# EAGLE board LPC_4TE_TOP_3_53 (EAGLE 5.04)
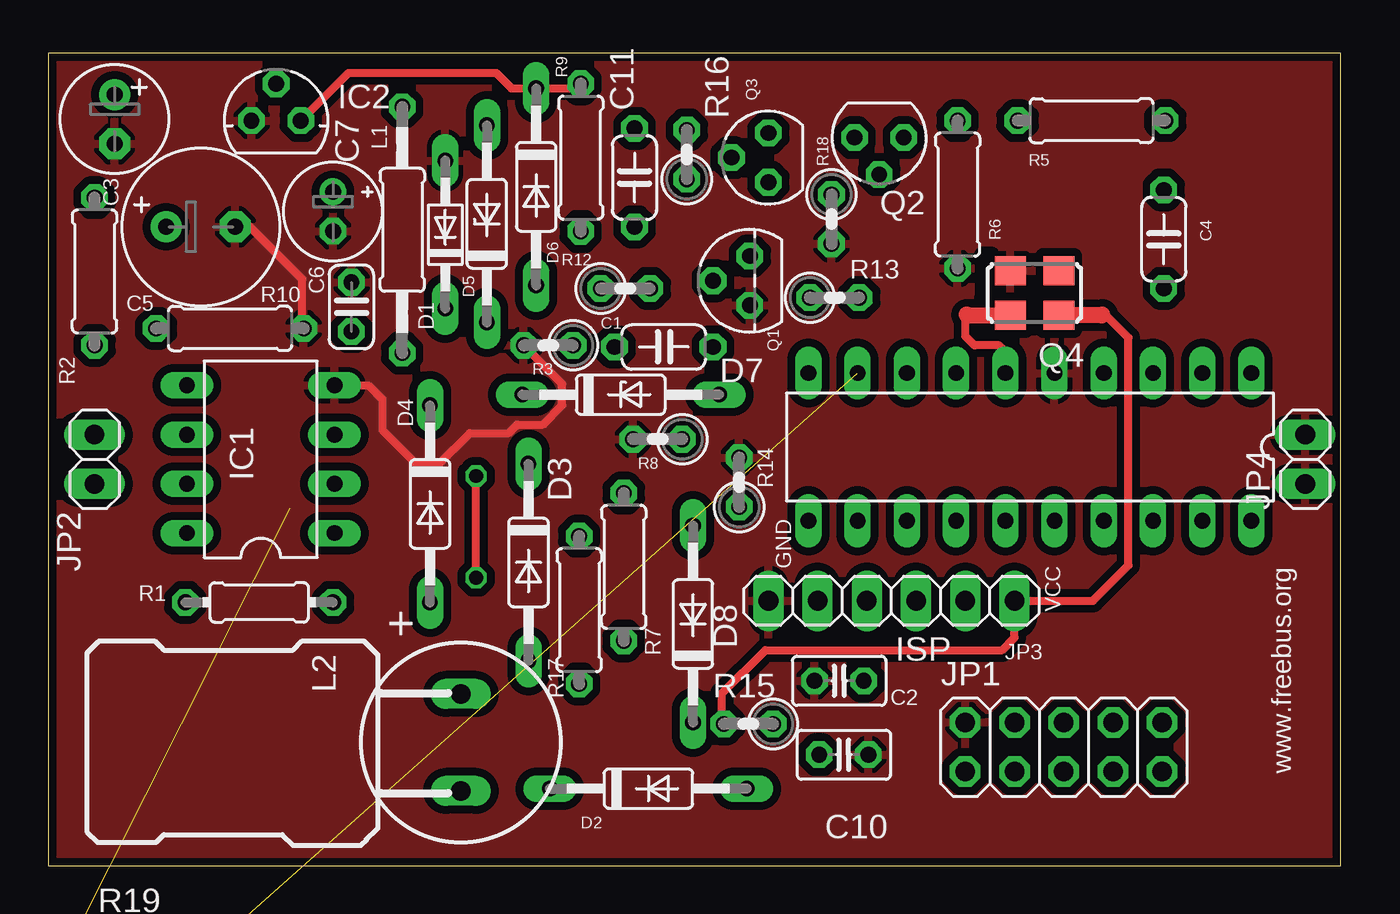
[diagram p0: board, top side]
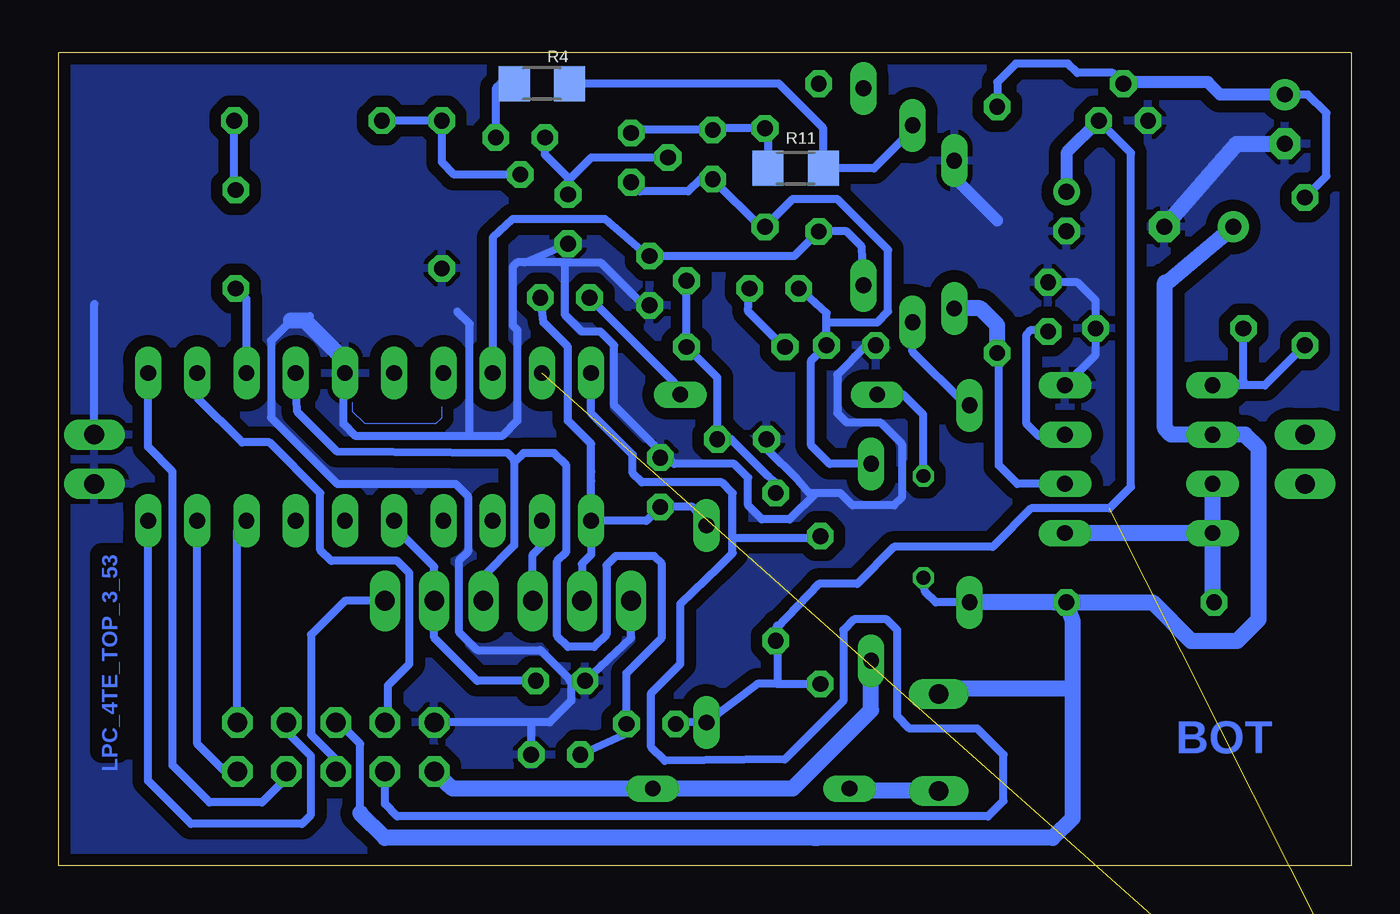
[diagram p1: board, bottom side, seen from below]

Size 66.68 x 41.91 mm. Coordinates in mm from the lower left corner, seen from the top.
Outline: 0,41.91 0,0 66.68,0 66.68,41.91 0,41.91
Copper layers (1*16): Top 0.035mm / dielectric 1.5mm / Bottom 0.035mm
Design rules "default_freebus": minimum track width 10mil, minimum drill 24mil, track to track 8mil, track to pad 8mil, pad to pad 8mil, via to via 8mil, smd to smd 8mil, copper to edge 12mil, drill to drill 8mil, minimum pad ring 11mil, minimum via ring 8mil, stop-mask expansion 4mil, vias tented up to drill 0mil, thermal gap 10mil
tRestrict: area 48.2,29.3 to 48.7,31.5

## Footprints (pad centres in the part's own frame; a part is rotated, then mirrored left to right if it is on the bottom)
DIL20@1 = drill 0.813 long: 1 -11.43,-3.81; 2 -8.89,-3.81; 3 -6.35,-3.81; 4 -3.81,-3.81; 5 -1.27,-3.81; 6 1.27,-3.81; 7 3.81,-3.81; 8 6.35,-3.81; 9 8.89,-3.81; 10 11.43,-3.81; 11 11.43,3.81; 12 8.89,3.81; 13 6.35,3.81; 14 3.81,3.81; 15 1.27,3.81; 16 -1.27,3.81; 17 -3.81,3.81; 18 -6.35,3.81; 19 -8.89,3.81; 20 -11.43,3.81
C050-024X044 = drill 0.813 octagon: 1 -2.54,0; 2 2.54,0
C025-025X050 = drill 0.813 octagon: 1 -1.27,0; 2 1.27,0
E2,5-6 = drill 0.813 pad 1.6 round: + -1.27,0 | drill 0.813 pad 1.6 octagon: - 1.27,0
E3,5-8 = drill 0.813 pad 1.6 round: + -1.778,0 | drill 0.813 pad 1.6 octagon: - 1.778,0
C025-024X044 = drill 0.813 octagon: 1 -1.27,0; 2 1.27,0
E2-5 = drill 0.813 pad 1.27 round: + -1.016,0 | drill 0.813 pad 1.27 octagon: - 1.016,0
DO34-7 = drill 0.813 long: A 3.81,0; C -3.81,0
DO35-10 = drill 0.813 long: A 5.08,0; C -5.08,0
DO35Z10 = drill 0.813 long: A 5.08,0; C -5.08,0
DIL08 = drill 0.813 long: 1 -3.81,-3.81; 2 -1.27,-3.81; 3 1.27,-3.81; 4 3.81,-3.81; 5 3.81,3.81; 6 1.27,3.81; 7 -1.27,3.81; 8 -3.81,3.81
79LXX = drill 0.813 octagon: GND -1.27,0; IN 0,1.905; OUT 1.27,0
2X05 = drill 1.016 octagon: 1 -5.08,-1.27; 2 -5.08,1.27; 3 -2.54,-1.27; 4 -2.54,1.27; 5 0,-1.27; 6 0,1.27; 7 2.54,-1.27; 8 2.54,1.27; 9 5.08,-1.27; 10 5.08,1.27
1X02 = drill 1.016 long: 1 -1.27,0; 2 1.27,0
1X06 = drill 1.016 long: 1 -6.35,0; 2 -3.81,0; 3 -1.27,0; 4 1.27,0; 5 3.81,0; 6 6.35,0
0207/12 = drill 0.813 octagon: 1 -6.35,0; 2 6.35,0
BS11 = drill 1 long: 1 -2.5,0; 2 2.5,0
TO92 = drill 0.813 octagon: 1 1.27,0; 2 0,1.905; 3 -1.27,0
SOT54A = drill 0.813 octagon: B 0,1.905; C -1.27,0; E 1.27,0
SOT54D = drill 0.813 octagon: B 1.27,0; C 0,1.905; E -1.27,0
ASF = smd 1.6 x 1.5: 1 -1.25,-1.15; 2 1.25,-1.15; 3 1.25,1.15; 4 -1.25,1.15
0204/7 = drill 0.813 octagon: 1 -3.81,0; 2 3.81,0
0207/7 = drill 0.813 octagon: 1 -3.81,0; 2 3.81,0
0207/2V = drill 0.813 octagon: 1 -1.27,0; 2 1.27,0
R1206 = smd 1.6 x 1.803: 1 -1.422,0; 2 1.422,0

## Placement (x,y rotation side)
89LPC922  89LPC922  [DIL20@1]  50.64,21.59 180 top
C1  100n  [C050-024X044]  31.75,26.75 0 top
C2  100n  [C025-025X050]  40.8,9.53 0 top
C3  100µ  [E2,5-6]  3.41,38.5 270 top
C4  10n  [C050-024X044]  57.55,32.31 270 top
C5  100µ  [E3,5-8]  7.86,32.94 0 top
C6  470p  [C025-024X044]  15.64,28.81 90 top
C7  1µ  [E2-5]  14.68,33.73 270 top
C10  100n  [C025-025X050]  41.04,5.72 0 top
C11  10n  [C050-024X044]  30.24,35.48 90 top
D1  BAT46  [DO34-7]  20.48,32.54 90 top
D2  1N4148  [DO35-10]  30.96,3.97 0 top
D3  1N4148  [DO35-10]  24.76,15.64 270 top
D4  1N4148  [DO35-10]  19.68,18.65 270 top
D5  ZD7V5  [DO35Z10]  22.62,33.1 90 top
D6  BAT46  [DO35-10]  25.16,35.01 270 top
D7  ZPD18  [DO35Z10]  29.53,24.29 0 top
D8  1N4148  [DO35-10]  33.26,12.46 90 top
IC1  MC34063AP  [DIL08]  10.95,20.96 90 top
IC2  [79LXX]  11.75,38.42 0 top
JP1  [2X05]  52.39,6.11 0 top
JP2  [1X02]  2.38,20.96 90 top
JP3  [1X06]  43.5,13.65 180 top
JP4  [1X02]  64.85,20.96 90 top
L1  220µ  [0207/12]  18.26,32.78 90 top
L2  150mH  [BS11]  21.27,6.35 90 top
Q1  BC557  [TO92]  36.19,30.16 90 top
Q2  BC547  [SOT54A]  42.86,37.55 180 top
Q3  BC640  [SOT54D]  37.15,36.51 90 top
Q4  [ASF]  50.88,29.53 180 top
R1  3R3  [0204/7]  10.87,13.57 0 top
R2  3k6  [0207/7]  2.38,30.64 90 top
R3  100k  [0207/2V]  25.8,26.83 180 top
R4  2k2  [R1206]  41.75,40.32 0 bottom
R5  5k6  [0207/7]  53.82,38.42 180 top
R6  100k  [0207/7]  46.91,34.61 90 top
R7  82k  [0207/7]  29.69,15.4 90 top
R8  47k  [0207/2V]  31.43,21.99 180 top
R9  10k  [0207/7]  27.46,36.51 270 top
R10  1k2  [0207/7]  9.37,27.7 180 top
R11  1k  [R1206]  28.65,35.96 0 bottom
R12  10k  [0207/2V]  29.76,29.77 0 top
R13  330k  [0207/2V]  40.56,29.29 0 top
R14  1M  [0207/2V]  35.64,19.76 90 top
R15  5k6  [0207/2V]  36.12,7.3 180 top
R16  1k  [0207/2V]  32.94,36.67 90 top
R17  3k3  [0207/7]  27.38,13.18 90 top
R18  5R6  [0207/2V]  40.4,33.34 270 top
R19  3k3  [0207/7]  5.08,-3.81 0 top  (outside the outline)

## Library data of the parts
89LPC922 = micro-philips
C1-C7 C10 C11 L1 R1-R19 = rcl
D1-D8 = diode
IC1 = mc34063
IC2 = v-reg
JP1-JP4 = pinhead
L2 = inductor-neosid
Q1 = transistor-pnp
Q2 Q3 = transistor-small-signal
Q4 = crystal

## Nets
+5V: C3.+ IC2.IN L1.2 R2.2
/RESET: 89LPC922.4 C10.1 JP3.3 R15.1
EIB+: D2.A D3.A JP1.1
GND: 89LPC922.5 C2.1 C3.- C5.- C6.2 C7.- C10.2 D1.A IC1.4 IC2.GND JP1.2 JP3.6 JP4.1 JP4.2 Q1.3 Q4.2 R3.2 R6.1 R8.2 R10.1 R14.2 R18.2
N$1: 89LPC922.8 D6.A Q1.1 R9.2
N$2: C1.2 Q1.2 R7.2 R8.1
N$3: 89LPC922.9 R19.2
N$4: Q2.E Q3.C R18.1
N$5: 89LPC922.3 C4.2
N$6: 89LPC922.6 Q4.3
N$7: Q2.B R5.2 R6.2
N$8: IC1.1 IC1.7 IC1.8 R1.1
N$10: 89LPC922.11 D8.A JP3.5 R13.2 R14.1
N$11: IC1.5 R2.1 R10.2
N$12: D1.C IC1.2 L1.1
N$13: D2.C L2.1
N$14: C6.1 IC1.3
N$15: D4.C D5.C
N$16: C1.1 R12.2
N$17: C4.1 R5.1
N$18: Q2.C R4.1
N$19: D5.A R4.2 R11.2
N$20: C11.1 D3.C Q3.E R3.1 R12.1 R16.1
N$25: D7.A R13.1
N$28: C11.2 Q3.B R11.1 R16.2
N$29: 89LPC922.12 JP3.4
N$32: 89LPC922.15 C2.2 JP3.2
P0.0: 89LPC922.1 JP1.7
P0.1: 89LPC922.20 JP1.8
P0.2: 89LPC922.19 JP1.9
P0.3: 89LPC922.18 JP1.10
PROG: 89LPC922.2 JP1.4
PWM: 89LPC922.10 JP1.3 R17.2
VCC: C7.+ D6.C D8.C IC2.OUT JP1.5 JP3.1 Q4.4 R7.1 R9.1 R15.2 R17.1 R19.1
VERS: C5.+ D4.A D7.C IC1.6 JP1.6 L2.2 R1.2

## Tracks (layer width: path | path; a pad name or v marks a point on that pad's centre or on a via)
+5V
  Bottom 0.406: C3.+ 2.22,39.77 1.27,38.81 1.27,35.56 R2.2 | L1.2 18.26,40.4 17.3,41.35 14.6,41.35 14.13,40.88 12.3,40.88 IC2.IN
  Bottom 0.61: C3.+ 6.75,39.77 7.38,40.4 11.83,40.4 IC2.IN | L1.2 18.26,39.37
/RESET
  Bottom 0.406: 89LPC922.4 54.37,23.42 52.31,21.35 43.5,21.27 43.18,20.96 43.18,20.8 | 43.18,20.8 43.18,16.51 44.77,14.92 JP3.3 | 43.18,20.8 42.7,21.27 41.12,21.27 40.48,20.64 40.48,16.19 40.96,15.72 40.96,11.83 40.4,11.27 39.05,11.27 38.42,11.91 38.42,15.48 37.94,15.95 35.96,15.95 35.56,15.56 35.56,11.75 37.39,9.92 R15.1 37.31,6.83 C10.1
EIB+
  Bottom 0.813: JP1.1 46.35,3.97 40.8,3.97 D2.A 28.81,3.97 24.76,8.02 D3.A 24.76,10.24
GND
  Top 0.406: C5.- 10.16,33.18 13.1,30.24 13.1,27.78 R10.1 | IC1.4 16.51,24.77 17.22,24.05 17.22,22.46 18.97,20.72 20.16,20.72 21.75,22.3 23.73,22.3 24.17,22.74 25.52,22.74 26.51,23.73 26.51,24.84 R3.2
  Bottom 0.406: 40.24,9.53 40.24,8.49 41.35,7.38 42.31,7.38 | 40.24,9.53 41.83,11.11 45.08,11.11 46.04,12.07 46.04,12.54 46.04,15.72 45.56,16.19 45.56,19.05 46.2,19.69 52.31,19.69 55.72,23.1 55.72,27.07 54.69,28.1 | 42.31,7.38 JP1.2 | JP1.2 | 89LPC922.5 51.91,25.72 | C10.2 42.31,6.83 42.31,7.38 | JP3.6 37.15,11.75 C2.1 40.32,9.53 40.24,9.53 | 89LPC922.5 51.99,25.32 51.99,22.78 51.35,22.15 45.48,22.15 | 89LPC922.5 | 27.62,19.21 28.97,17.86 30.4,17.86 31.11,18.57 31.11,20 31.83,20.72 34.92,20.72 35.24,21.03 R14.2 35.64,21.35 38.02,23.73 38.02,26.83 38.73,27.54 39.69,27.54 40.56,28.42 40.56,31.12 | 27.62,19.21 26.35,19.21 25.72,18.57 23.57,18.57 23.18,18.97 23.18,21.75 24.29,22.86 26.03,22.86 26.51,23.34 26.51,25.32 25.08,26.75 24.61,26.75 R3.2 24.53,26.51 | 27.62,19.21 27.94,19.21 28.57,19.92 30.08,21.43 30.08,21.99 30.16,21.91 R8.2 30.08,22.07 | Q1.3 36.51,28.89 38.73,31.12 40.56,31.12 | 40.56,31.12 42.62,31.12 | 42.62,31.12 43.02,31.12 43.26,30.88 43.26,27.86 43.02,27.62 43.02,22.94 43.81,22.15 45.48,22.15 | 42.62,31.12 R18.2 | IC1.4 13.18,26.35 R10.1 13.18,29.13 14.13,30.08 C6.2 | C6.2 | JP4.2 64.85,28.97 | 46.12,28.58 45.48,27.94 45.48,22.15 | 53.97,28.1 53.73,28.34
  Bottom 0.61: 18.26,33.26 20.48,35.48 D1.A
  Bottom 0.813: 51.91,25.72 51.91,26.04 53.97,28.1 54.69,28.1 | C3.- 5.9,37.23 C5.-
  pour Bottom (isolate 0.61): 0,42.23 67.15,42.23 67.15,-0.32 -0.4,-0.32 -0.4,41.99
  pour Top (isolate 0.406): -0.16,41.99 67.15,41.99 67.15,-0.16 -0.16,-0.16 -0.16,41.35
N$1
  Bottom 0.406: 89LPC922.8 44.29,25.88 | 44.29,25.88 | 44.29,25.96 89LPC922.8 | 44.29,25.96 44.29,26.35 44.29,27.78 44.29,32.39 43.26,33.34 38.5,33.34 36.27,31.43 Q1.1 33.65,31.43 33.34,31.43 31.91,31.43 31.59,31.43 30.96,31.43 30.8,31.43 28.73,31.43 R9.2 26.03,32.7 25.24,31.91 D6.A | 89LPC922.8 44.21,25.48 | 44.53,25.88 44.37,25.88 44.29,25.96
N$2
  Bottom 0.406: Q1.2 34.29,27.46 C1.2 32.7,25.16 R8.1 31.99,21.99 30.08,20.08 29.69,19.76 R7.2
N$3  (1 unrouted)
N$4
  Bottom 0.406: Q3.C 39.21,36.51 40.32,35.4 | 40.32,35.4 40.4,35.32 R18.1 | Q2.E 41.59,36.67 40.32,35.4
N$5
  Bottom 0.406: 89LPC922.3 56.99,29.21 C4.2
N$6
  Top 0.406: 47.39,28.42 47.31,28.34 47.31,27.31 47.78,26.83 49.05,26.83 49.37,26.51 89LPC922.6
  Top 0.813: Q4.3 47.43,28.38 47.39,28.42
N$7
  Bottom 0.406: Q2.B 46.28,35.64 46.91,36.27 R6.2 R5.2 | R5.2
N$8
  Bottom 0.813: IC1.8 IC1.1 | IC1.8 IC1.7 | IC1.8 7.14,13.42 R1.1
N$9
  Bottom 0: 51.51,23.89 51.51,23.42 50.88,22.78 47.23,22.78 46.91,23.1 46.91,23.65
N$10
  Bottom 0.406: JP3.5 39.69,15.56 39.21,16.03 89LPC922.11 | 89LPC922.11 39.21,19.84 39.21,20.32 39.21,21.75 40.4,22.94 40.4,26.75 41.67,28.02 R13.2 | 89LPC922.11 36.35,17.78 R14.1 33.97,18.49 D8.A
N$11
  Bottom 0.406: R2.1 4.45,24.77 5.79,24.77 | 5.79,24.77 IC1.5 | R10.2 5.56,25 5.79,24.77
N$12
  Bottom 0.406: IC1.2 17.22,19.68 18.18,20.64 18.18,26.43 L1.1
  Bottom 0.813: L1.1 18.26,27.86 19.13,28.73 D1.C | D1.C
N$13
  Bottom 0.813: D2.C 25.76,3.85 L2.1
N$14
  Bottom 0.406: IC1.3 14.84,22.15 16.11,22.15 16.75,22.78 16.75,27.38 16.51,27.62 15.72,27.62 C6.1
N$15
  Bottom 0.406: D4.C 19.92,23.81 22.62,26.51 D5.C | D5.C
N$16
  Bottom 0.406: C1.1 29.29,26.75 31.11,28.58 R12.2
N$17
  Bottom 0.406: R5.1 57.63,34.92 C4.1
N$18
  Bottom 0.406: Q2.C 44.13,40.08 43.89,40.32 R4.1
N$19
  Bottom 0.406: D5.A 22.62,37.94 24.61,35.96 R11.2 | R11.2 | R4.2 29.53,40.32 27.23,38.02 R11.2
N$20
  Bottom 0.406: D3.C 26.91,20.72 27.86,21.67 27.86,26.04 R3.1 27.07,28.02 | 27.07,28.02 27.07,28.5 R12.1 | 27.07,28.02 24.45,28.02 23.89,28.58 23.89,31.75 26.51,34.37 28.81,34.37 C11.1 30.32,32.86 30.4,32.86 R16.1 33.58,35.4 34.21,34.77 36.67,34.77 Q3.E
N$25
  Bottom 0.406: R13.1 34.92,24.92 D7.A
N$28
  Bottom 0.406: Q3.B 36.99,37.94 R16.2 32.86,38.02 C11.2 30.08,37.86 R11.1
N$29
  Bottom 0.406: JP3.4 42.23,16.03 41.75,16.51 89LPC922.12
N$32
  Bottom 0.406: JP3.2 47.31,15.4 49.37,17.46 89LPC922.15 | JP3.2 47.31,14.61 47.31,13.34 | C2.2 45.08,9.53 47.31,11.75 JP3.2
P0.0
  Bottom 0.406: JP1.7 54.93,4.52 56.2,3.25 58.9,3.25 60.8,5.16 60.8,20.32 62.07,21.59 89LPC922.1
P0.1
  Bottom 0.406: JP1.8 54.93,6.91 53.66,5.64 53.66,2.62 54.13,2.14 59.85,2.14 62.07,4.37 89LPC922.20
P0.2
  Bottom 0.406: JP1.9 58.1,4.84 59.53,6.27 89LPC922.19
P0.3
  Bottom 0.406: JP1.10 57.47,17.3 89LPC922.18
PROG
  Bottom 0.406: 89LPC922.2 59.53,24.13 57.23,21.83 55.8,21.83 53.18,19.21 53.18,16.27 52.63,15.72 49.21,15.72 48.58,15.08 48.58,10.4 49.69,9.29 49.69,7.54 JP1.4 50.01,7.54
PWM
  Bottom 0.406: JP1.3 49.85,3.18 49.21,2.54 18.73,2.54 17.94,3.33 17.94,5.72 19.29,7.06 22.78,7.06 23.42,7.7 23.42,12.14 23.97,12.7 25.64,12.7 26.19,12.14 26.19,8.49 26.43,8.26 29.21,5.48 35.4,5.4 36.12,6.11 36.12,8.89 34.61,10.4 34.61,13.49 32.62,15.4 31.91,16.11 31.91,16.91 | 89LPC922.10 39.21,23.34 37.07,21.19 37.07,20.24 36.59,19.76 32.46,19.76 31.91,19.21 31.91,16.91 | R17.2 27.38,16.91 31.91,16.91
VCC  (1 unrouted)
  Top 0.406: D6.C 23.89,40.08 23.1,40.88 15.48,40.88 IC2.OUT | D6.C | D6.C 27.22,40.08 R9.1 | R15.2 34.77,7.38 34.77,8.89 36.99,11.11 49.21,11.11 49.85,11.75 JP3.1 53.9,13.65 55.72,15.48 55.72,27.23 54.53,28.42 54.37,28.42
  Top 0.813: Q4.4 54.33,28.38 54.37,28.42
  Bottom 0.406: R15.2 34.61,7.38 D8.C 30.64,9.37 29.61,9.37 | 29.61,9.37 R17.1 | 29.61,9.37 29.61,12.38 R7.1 29.69,12.22 27.46,14.53 25.48,14.53 23.57,16.43 18.49,16.43 18.41,16.51 16.51,18.42 12.46,18.42 11.35,19.53 11.35,36.75 IC2.OUT | JP1.5 52.39,5.48 53.66,6.75 53.66,11.91 51.91,13.65 JP3.1
  Bottom 0.61: C7.+ 14.68,36.75 IC2.OUT
VERS  (via drill 0.7)
  Top 0.406: v22.07,14.84 v22.07,20.08
  Bottom 0.406: IC1.6 | IC1.6 | JP1.6 52.23,7.38 51.12,6.27 51.12,2.7 | D4.A 21.43,13.57 21.99,14.13 v22.07,14.84 | v22.07,20.08 22.07,23.26 23.1,24.29 D7.C
  Bottom 0.813: 51.12,2.7 49.85,1.43 27.7,1.43 | 27.7,1.43 27.54,1.43 | R1.2 10.24,13.57 8.25,11.59 5.87,11.59 4.76,12.7 4.76,21.51 5.48,22.23 IC1.6 | IC1.6 | 14.37,9.13 14.37,2.46 15.4,1.43 27.7,1.43 | 14.37,9.13 14.37,12.62 R1.2 | IC1.6 9.29,22.23 9.6,22.54 9.6,30.08 9.49,30.08 C5.+ | R1.2 15.32,13.57 D4.A | L2.2 20.99,9.13 14.37,9.13

## Text on the board
Bottom: LPC_4TE_TOP_3_53 | BOT
tPlace: +
tNames: GND | www.freebus.org | VCC | ISP